# EAGLE board test02.postroute (EAGLE 7.5.0)
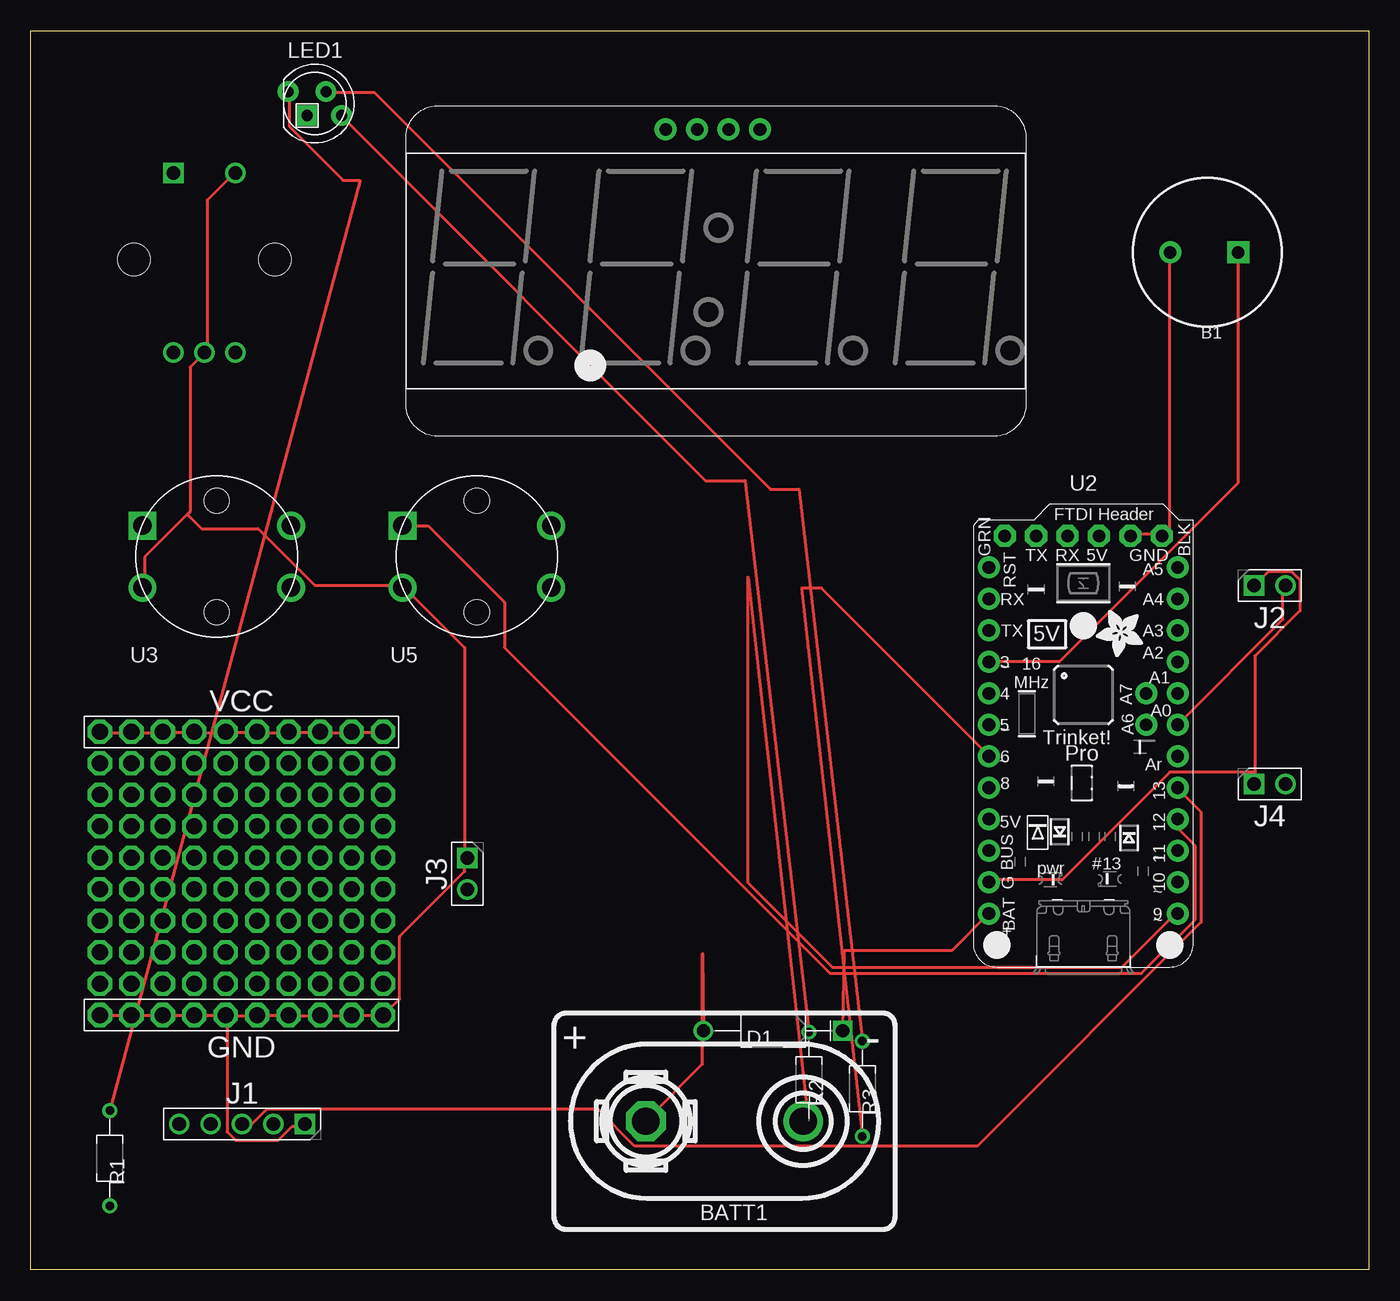
[diagram p0: board, top side]
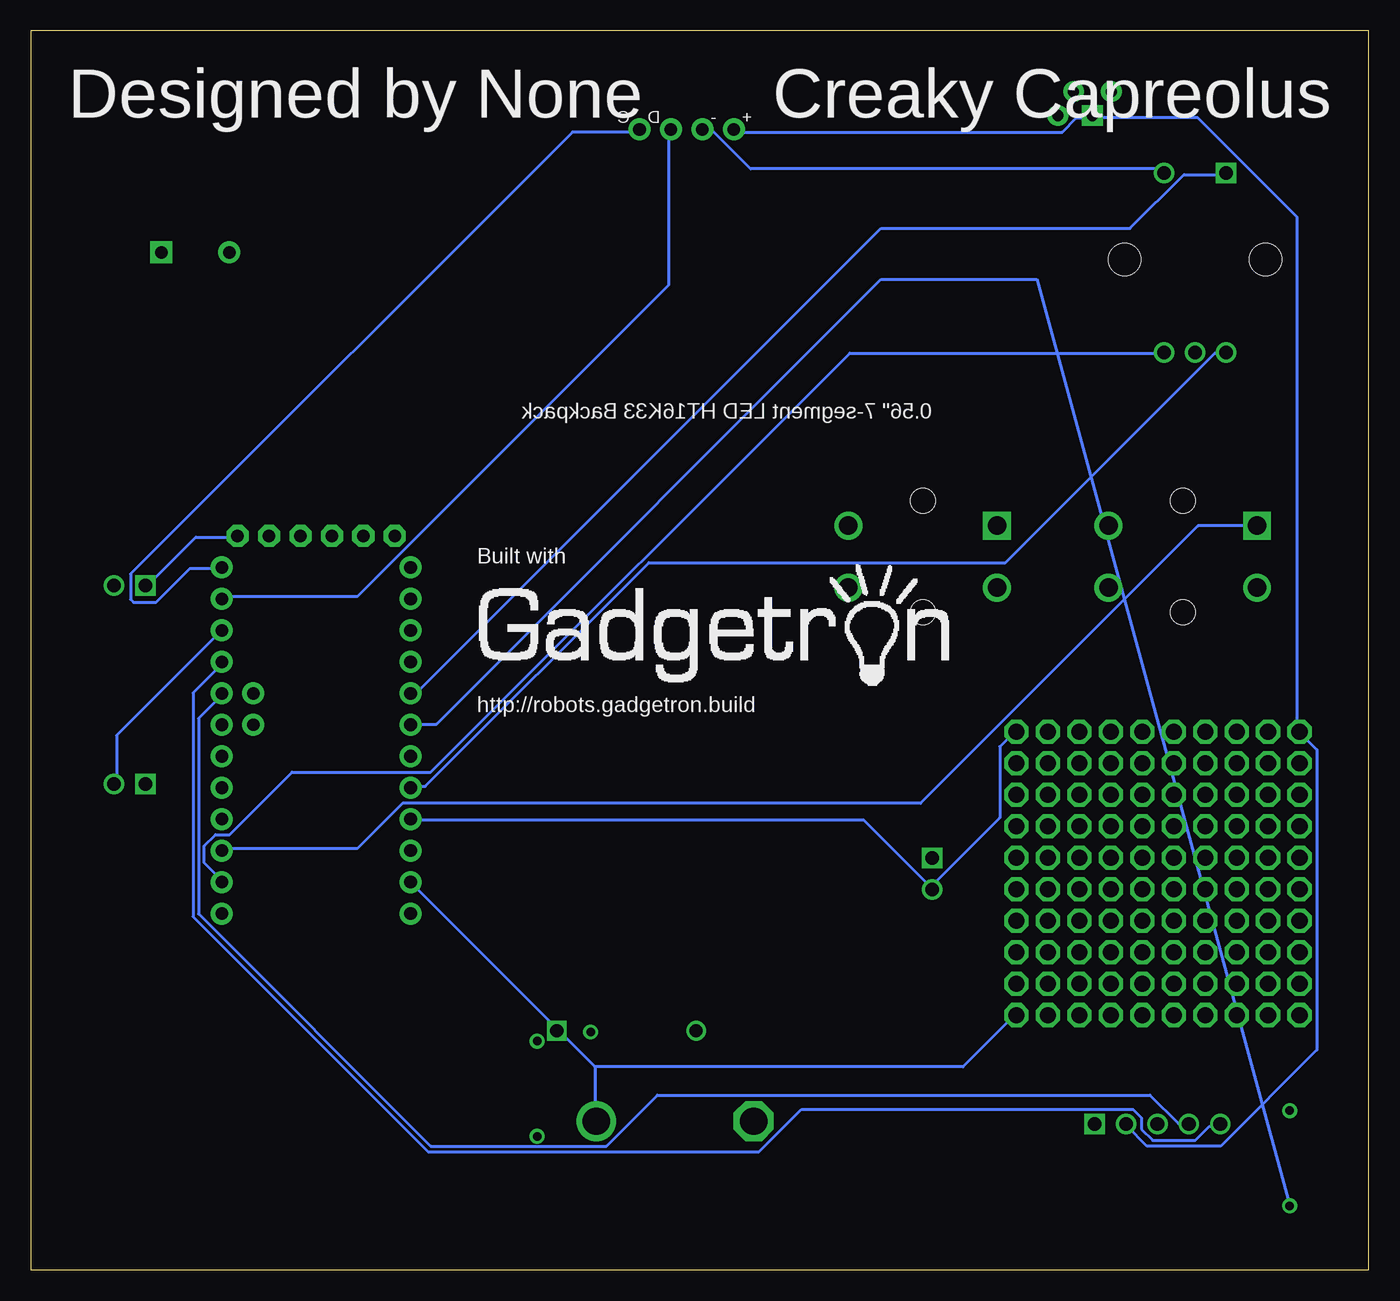
[diagram p1: board, bottom side, seen from below]

Size 108 x 100 mm. Coordinates in mm from the lower left corner, seen from the top.
Outline: 0,0 0,100 108,100 108,0 0,0
Copper layers (1*16): Top 0.035mm / dielectric 1.5mm / Bottom 0.035mm
Design rules "default": minimum track width 10mil, minimum drill 0.6mm, track to track 8mil, track to pad 8mil, pad to pad 8mil, via to via 8mil, smd to smd 8mil, copper to edge 40mil, drill to drill 8mil, minimum pad ring 10mil, minimum via ring 8mil, stop-mask expansion 4mil, vias tented up to drill 0mil, thermal gap 10mil

## Footprints (pad centres in the part's own frame; a part is rotated, then mirrored left to right if it is on the bottom)
BUZZER-12MM-ADAFRUIT-160 = drill 1 pad 1.778 square: + 2.5,0 | drill 1 pad 1.778: - -3,0
BATTERY_9V_KEYSTONE_968 = drill 2.2: N 6.35,0 | drill 2.2 octagon: P -6.35,0
DIOAD1125W78L520D270_HS = drill 1.06 pad 1.59: A 5.625,0 | drill 1.06 pad 1.59 square: C -5.625,0
HDRV5W63P254_5X1_1270X254H838_HS = drill 1.1 pad 1.65 square: 1 0,0 | drill 1.1 pad 1.65: 2 2.54,0; 3 5.08,0; 4 7.62,0; 5 10.16,0
HDRV2W63P254_2X1_508X254H838_HS = drill 1.1 pad 1.65 square: 1 0,0 | drill 1.1 pad 1.65: 2 2.54,0
LED5MMRGB = drill 0.9 pad 1.676: 1 -2.159,0.968; 3 0.889,0.968; 4 2.159,-0.968 | drill 0.9 pad 1.676 square: 2 -0.635,-0.968
RESAD770W45L370D210_HS = drill 0.7 pad 1.1: 1 -3.85,0; 2 3.85,0
PROTO-AREA-10X10 = drill 1.3 octagon: P$1 0,0; P$2 2.54,0; P$3 5.08,0; P$4 7.62,0; P$5 10.16,0; P$6 12.7,0; P$7 15.24,0; P$8 17.78,0; P$9 20.32,0; P$10 22.86,0; P$11 0,22.86; P$12 2.54,22.86; P$13 5.08,22.86; P$14 7.62,22.86; P$15 10.16,22.86; P$16 12.7,22.86; P$17 15.24,22.86; P$18 17.78,22.86; P$19 20.32,22.86; P$20 22.86,22.86; P$21 0,2.54; P$22 2.54,2.54; P$23 5.08,2.54; P$24 7.62,2.54; P$25 10.16,2.54; P$26 12.7,2.54; P$27 15.24,2.54; P$28 17.78,2.54; P$29 20.32,2.54; P$30 22.86,2.54; P$31 22.86,5.08; P$32 20.32,5.08; P$33 17.78,5.08; P$34 15.24,5.08; P$35 12.7,5.08; P$36 10.16,5.08; P$37 7.62,5.08; P$38 5.08,5.08; P$39 2.54,5.08; P$40 0,5.08; P$41 0,7.62; P$42 2.54,7.62; P$43 5.08,7.62; P$44 7.62,7.62; P$45 10.16,7.62; P$46 12.7,7.62; P$47 15.24,7.62; P$48 17.78,7.62; P$49 20.32,7.62; P$50 22.86,7.62; P$51 22.86,10.16; P$52 20.32,10.16; P$53 17.78,10.16; P$54 15.24,10.16; P$55 12.7,10.16; P$56 10.16,10.16; P$57 7.62,10.16; P$58 5.08,10.16; P$59 2.54,10.16; P$60 0,10.16; P$61 0,12.7; P$62 2.54,12.7; P$63 5.08,12.7; P$64 7.62,12.7; P$65 10.16,12.7; P$66 12.7,12.7; P$67 15.24,12.7; P$68 17.78,12.7; P$69 20.32,12.7; P$70 22.86,12.7; P$71 22.86,15.24; P$72 20.32,15.24; P$73 17.78,15.24; P$74 15.24,15.24; P$75 12.7,15.24; P$76 10.16,15.24; P$77 7.62,15.24; P$78 5.08,15.24; P$79 2.54,15.24; P$80 0,15.24; P$81 0,17.78; P$82 2.54,17.78; P$83 5.08,17.78; P$84 7.62,17.78; P$85 10.16,17.78; P$86 12.7,17.78; P$87 15.24,17.78; P$88 17.78,17.78; P$89 20.32,17.78; P$90 22.86,17.78; P$91 22.86,20.32; P$92 20.32,20.32; P$93 17.78,20.32; P$94 15.24,20.32; P$95 12.7,20.32; P$96 10.16,20.32; P$97 7.62,20.32; P$98 5.08,20.32; P$99 2.54,20.32; P$100 0,20.32
ADAFRUIT-PRO-TRINKET-5V = drill 1.016 pad 1.778: +5V 7.62,24.13; A0 -7.62,16.51; A1 -7.62,13.97; A2 -7.62,11.43; A3 -7.62,8.89; A4 -7.62,6.35; A5 -7.62,3.81; AREF -7.62,19.05; D3 7.62,11.43; D4 7.62,13.97; D5 7.62,16.51; D6 7.62,19.05; D8 7.62,21.59; D9 -7.62,31.75; D10 -7.62,29.21; D11 -7.62,26.67; D12 -7.62,24.13; D13 -7.62,21.59; GND2 7.62,29.21; RESET 7.62,3.81; RXD1 7.62,6.35; TXD1 7.62,8.89; VBAT 7.62,31.75; VBUS1 7.62,26.67 | drill 1 pad 1.778: A6 -5.08,16.51; A7 -5.08,13.97 | drill 1.016 pad 1.778 octagon: DTR/RTS 6.35,1.27; GND -6.35,1.27; GND1 -3.81,1.27; RXD 1.27,1.27; TXD 3.81,1.27; VBUS -1.27,1.27
BUTTON-TACTILE-ROUND-ADAFRUIT1009 = drill 1.5 square: P -6,2.5 | drill 1.5: P2 6,2.5; S -6,-2.5; S2 6,-2.5 | hole 2: 0,-4.5; 0,4.5
ROTARY-ENCODER-W/BUTTON-ADAFRUIT377 = drill 1.1: A -2.5,-7.5; B 2.5,-7.5; BUTB 2.5,7; COMMON 0,-7.5 | drill 1.1 square: BUTA -2.5,7 | hole 2.6: -5.7,0; 5.7,0
ADAFRUIT-7SEG-BACKPACK = drill 1.016 pad 1.778: GND -1.524,11.43; SCL 3.556,11.43; SDA 1.016,11.43; VDD -4.064,11.43

## Placement (x,y rotation side)
B1  BUZZER-ADAFRUIT-160  [BUZZER-12MM-ADAFRUIT-160]  94.98,82.13 0 top
BATT1  BATTERY-9V-VERTICAL  [BATTERY_9V_KEYSTONE_968]  56,12 0 top
D1  [DIOAD1125W78L520D270_HS]  59.92,19.31 180 top
J1  [HDRV5W63P254_5X1_1270X254H838_HS]  22.13,11.77 180 top
J2  [HDRV2W63P254_2X1_508X254H838_HS]  98.76,55.23 0 top
J3  [HDRV2W63P254_2X1_508X254H838_HS]  35.23,33.24 270 top
J4  [HDRV2W63P254_2X1_508X254H838_HS]  98.76,39.23 0 top
LED1  RGBLED_CA-5MM  [LED5MMRGB]  22.93,94.14 0 top
LOGO  [BUILT_WITH_GADGETRON]  54,50 0 bottom
R1  150  [RESAD770W45L370D210_HS]  6.37,9.01 270 top
R2  100  [RESAD770W45L370D210_HS]  62.8,15.35 270 top
R3  100  [RESAD770W45L370D210_HS]  67.13,14.62 270 top
U1  PROTO-AREA-10X10  [PROTO-AREA-10X10]  5.57,20.57 0 top
U2  ADAFRUIT-PRO-TRINKET-5V-BOB  [ADAFRUIT-PRO-TRINKET-5V]  84.97,60.51 180 top
U3  BUTTON-TACTILE-ROUND  [BUTTON-TACTILE-ROUND-ADAFRUIT1009]  15,57.57 0 top
U4  ROTARY-ENCODER-W/BUTTON-ADAFRUIT377  [ROTARY-ENCODER-W/BUTTON-ADAFRUIT377]  14,81.55 0 top
U5  BUTTON-TACTILE-ROUND  [BUTTON-TACTILE-ROUND-ADAFRUIT1009]  36,57.57 0 top
U6  ADAFRUIT-7SEG-BACKPACK-RED  [ADAFRUIT-7SEG-BACKPACK]  55.31,80.63 0 top

## Library data of the parts
B1 = Components; DIST: Adafruit; DISTPN: 160; HIERARCHY_NAME: buzzer.u1
BATT1 = Components; DIST: Digikey; DISTPN: 36-968-ND; HIERARCHY_NAME: battery.BATT1
D1 = KoalaBuild; DATASHEET: http://www.st.com/web/en/resource/technical/document/datasheet/CD00001625.pdf; DATA_SHEET: http://www.st.com/web/en/resource/technical/document/datasheet/CD00001625.pdf; DB: /Users/swanson/research/NVSL/src/with-git/gtron_devel/Gadgets/Tools/Koala/Koala/PartLibrary/Digikey/Schottky-Diodes-TH.csv; DEVICE: TH-DO-41-AND-DO-204AL; DIST: Digikey; DISTPN: 497-4547-1-ND; HIERARCHY_NAME: battery.D1; IMAGE: http://media.digikey.com/photos/STMicro%20Photos/1N5819.JPG; IRECT: 1A; MFR: STMicroelectronics; MIN_QTY: 1; MPN: 1N5817; PACKAGE: DIOAD1125W78L520D270_HS; PRICE: $0.57; SIZE: TH; STOCK: STOCK; VALUE: 450mV; VREV: 20V
J1 = Components; DIST: Digikey; DISTPN: S6103-ND; HIERARCHY_NAME: digital_2.J1; PIN1: GND; PIN2: D1; PIN3: D2; PIN4: D3; PIN5: D4
J2 = Components; DIST: Digikey; DISTPN: S7000-ND; HIERARCHY_NAME: analog.J1; PIN1: GND; PIN2: A1
J3 = Components; DIST: Digikey; DISTPN: S7000-ND; HIERARCHY_NAME: power.J1; PIN1: GND; PIN2: VDD
J4 = Components; DIST: Digikey; DISTPN: S7000-ND; HIERARCHY_NAME: digital.J1; PIN1: GND; PIN2: D1
LED1 = Components; DIST: Adafruit; DISTPN: 302; HIERARCHY_NAME: led_2.LED1
LOGO = Artwork
R1 = KoalaBuild; CASE: TH; DATASHEET: http://www.yageo.com/NewPortal/yageodocoutput?fileName=/pdf/throughhole/Yageo_LR_CFR_2013.pdf; DATA_SHEET: http://www.yageo.com/NewPortal/yageodocoutput?fileName=/pdf/throughhole/Yageo_LR_CFR_2013.pdf; DB: /Users/swanson/research/NVSL/src/with-git/gtron_devel/Gadgets/Tools/Koala/Koala/PartLibrary/Digikey/Resistors-TH.csv; DEVICE: TH-1/6W-CARBON; DIST: Digikey; DISTPN: 150EBK-ND; HIERARCHY_NAME: led_2.U$3; IMAGE: http://media.digikey.com/Renders/Yageo%20Renders/CFR-12JR-150R.jpg; MFR: Yageo; MIN_QTY: 1; MPN: CFR-12JB-52-150R; PACKAGE: RESAD770W45L370D210_HS; PRICE: $0.10; PWR: 167mW; SIZE: TH; STOCK: STOCK; TOL: 5%; VALUE_QUERY: 150
R2 = KoalaBuild; CASE: TH; DATASHEET: http://www.yageo.com/NewPortal/yageodocoutput?fileName=/pdf/throughhole/Yageo_LR_CFR_2013.pdf; DATA_SHEET: http://www.yageo.com/NewPortal/yageodocoutput?fileName=/pdf/throughhole/Yageo_LR_CFR_2013.pdf; DB: /Users/swanson/research/NVSL/src/with-git/gtron_devel/Gadgets/Tools/Koala/Koala/PartLibrary/Digikey/Resistors-TH.csv; DEVICE: TH-1/6W-CARBON; DIST: Digikey; DISTPN: 100EBK-ND; HIERARCHY_NAME: led_2.U$1; IMAGE: http://media.digikey.com/Renders/Yageo%20Renders/CFR-12JR-100R.jpg; MFR: Yageo; MIN_QTY: 1; MPN: CFR-12JB-52-100R; PACKAGE: RESAD770W45L370D210_HS; PRICE: $0.10; PWR: 167mW; SIZE: TH; STOCK: STOCK; TOL: 5%; VALUE_QUERY: 100
R3 = KoalaBuild; CASE: TH; DATASHEET: http://www.yageo.com/NewPortal/yageodocoutput?fileName=/pdf/throughhole/Yageo_LR_CFR_2013.pdf; DATA_SHEET: http://www.yageo.com/NewPortal/yageodocoutput?fileName=/pdf/throughhole/Yageo_LR_CFR_2013.pdf; DB: /Users/swanson/research/NVSL/src/with-git/gtron_devel/Gadgets/Tools/Koala/Koala/PartLibrary/Digikey/Resistors-TH.csv; DEVICE: TH-1/6W-CARBON; DIST: Digikey; DISTPN: 100EBK-ND; HIERARCHY_NAME: led_2.U$2; IMAGE: http://media.digikey.com/Renders/Yageo%20Renders/CFR-12JR-100R.jpg; MFR: Yageo; MIN_QTY: 1; MPN: CFR-12JB-52-100R; PACKAGE: RESAD770W45L370D210_HS; PRICE: $0.10; PWR: 167mW; SIZE: TH; STOCK: STOCK; TOL: 5%; VALUE_QUERY: 100
U1 = Components; DIST: Gadgetron; DISTPN: proto-area-10x10; HIERARCHY_NAME: proto_area.u1
U2 = BOBs; DIST: Adafruit; DISTPN: 2000; HIERARCHY_NAME: brain.U1
U3 = Components; DIST: Adafruit; DISTPN: 1009; HIERARCHY_NAME: button.B1
U4 = Components; DIST: Adafruit; DISTPN: 377; HIERARCHY_NAME: knob.U1
U5 = Components; DIST: Adafruit; DISTPN: 1009; HIERARCHY_NAME: button_2.B1
U6 = BOBs; DIST: Adafruit; DISTPN: 878; HIERARCHY_NAME: display.u1

## Nets
2_0_BUZZER: B1.- BATT1.N J1.1 J2.1 J3.1 J4.1 U1.P$1 U1.P$2 U1.P$3 U1.P$4 U1.P$5 U1.P$6 U1.P$7 U1.P$8 U1.P$9 U1.P$10 U2.GND U2.GND1 U2.GND2 U3.S U4.BUTB U4.COMMON U5.S U6.GND
+5V_7_BRAIN: J1.2 J3.2 LED1.2 U1.P$11 U1.P$12 U1.P$13 U1.P$14 U1.P$15 U1.P$16 U1.P$17 U1.P$18 U1.P$19 U1.P$20 U2.+5V U6.VDD
A0_7_BRAIN: J2.2 U2.A0
A1_7_BRAIN: J1.4 U2.A1
A2_7_BRAIN: J1.5 U2.A2
A3_7_BRAIN: J4.2 U2.A3
A4_7_BRAIN: U2.A4 U6.SDA
A5_7_BRAIN: U2.A5 U6.SCL
A6_7_BRAIN: U2.A6
A7_7_BRAIN: U2.A7
AREF_7_BRAIN: U2.AREF
D3_7_BRAIN: B1.+ U2.D3
D4_7_BRAIN: U2.D4 U4.BUTA
D5_7_BRAIN: R1.2 U2.D5
D6_7_BRAIN: R3.2 U2.D6
D8_7_BRAIN: U2.D8 U4.A
D9_7_BRAIN: R2.2 U2.D9
D10_7_BRAIN: U2.D10 U4.B
D11_7_BRAIN: U2.D11 U3.P
D12_7_BRAIN: U2.D12 U5.P
D13_7_BRAIN: J1.3 U2.D13
DTR/RTS_7_BRAIN: U2.DTR/RTS
N$1_3_BATTERY: BATT1.P D1.A
N$1_4_LED_2: LED1.4 R2.1
N$2_4_LED_2: LED1.3 R3.1
N$3_4_LED_2: LED1.1 R1.1
POS_3_BATTERY: D1.C U2.VBAT
RESET_7_BRAIN: U2.RESET
RXD1_7_BRAIN: U2.RXD1
RXD_7_BRAIN: U2.RXD
TXD1_7_BRAIN: U2.TXD1
TXD_7_BRAIN: U2.TXD
VBUS1_7_BRAIN: U2.VBUS1
VBUS_7_BRAIN: U2.VBUS

## Tracks (layer width: path | path; a pad name or v marks a point on that pad's centre or on a via)
2_0_BUZZER
  Top 0.254: J1.1 22,11.59 21.08,11.59 19.94,10.45 16.51,10.45 15.82,11.14 15.82,20.51 | U4.BUTB 16.28,88.41 14.22,86.35 14.22,74.23 U4.COMMON 13.99,74 12.85,72.86 12.85,61.2 12.62,60.97 | 15.82,20.51 18.11,20.51 U1.P$6 18.34,20.51 20.62,20.51 U1.P$7 20.85,20.51 23.14,20.51 U1.P$8 23.37,20.51 25.88,20.51 U1.P$9 26.11,20.51 28.4,20.51 U1.P$10 28.62,20.74 29.77,21.88 29.77,26.91 35.03,32.17 35.03,33.08 J3.1 35.03,33.31 35.03,50.23 30.23,55.03 U5.S 30,55.26 22.91,55.26 18.34,59.83 13.77,59.83 12.62,60.97 | 15.82,20.51 U1.P$5 15.59,20.51 13.31,20.51 U1.P$4 13.08,20.51 10.8,20.51 U1.P$3 10.57,20.51 8.28,20.51 U1.P$2 8.05,20.51 5.77,20.51 U1.P$1 | 12.62,60.97 9.19,57.54 9.19,55.26 U3.S | U2.GND2 77.55,31.48 83.26,31.48 91.95,40.17 98.81,40.17 | U2.GND1 88.98,59.37 91.26,59.37 U2.GND 91.49,59.37 91.95,59.83 91.95,82 B1.- | 98.81,40.17 98.81,49.54 102.46,53.2 102.46,55.72 101.78,56.4 99.95,56.4 98.81,55.26 J2.1 | J4.1 98.81,39.26 98.81,40.17
  Bottom 0.254: U6.GND 53.77,91.83 52.86,91.83 49.88,88.86 16.74,88.86 16.51,88.63 U4.BUTB | 62.46,16.4 32.74,16.4 28.62,20.51 U1.P$10 | U2.GND2 77.32,31.25 62.46,16.4 | U2.GND 91.49,59.14 94.69,59.14 98.58,55.26 J2.1 | 62.46,16.4 62.46,12.05 BATT1.N
+5V_7_BRAIN
  Top 0.254: U1.P$20 28.4,43.37 26.11,43.37 U1.P$19 25.88,43.37 23.37,43.37 U1.P$18 23.14,43.37 20.85,43.37 U1.P$17 20.62,43.37 18.34,43.37 U1.P$16 18.11,43.37 15.82,43.37 U1.P$15 15.59,43.37 13.31,43.37 U1.P$14 13.08,43.37 10.8,43.37 U1.P$13 10.57,43.37 8.28,43.37 U1.P$12 8.05,43.37 5.77,43.37 U1.P$11
  Bottom 0.254: U6.VDD 51.03,91.83 24.74,91.83 23.6,92.98 22.45,92.98 LED1.2 22.23,92.98 13.77,92.98 5.77,84.98 5.77,43.6 U1.P$11 5.54,43.37 4.16,42 4.16,17.77 11.94,9.99 17.88,9.99 19.48,11.59 J1.2 | U1.P$20 28.62,43.37 29.77,42.23 29.77,36.51 35.03,31.25 35.03,30.8 J3.2 35.25,30.8 40.74,36.28 77.32,36.28 U2.+5V
A0_7_BRAIN
  Top 0.254: U2.A0 92.63,44.06 101.09,52.52 101.09,55.03 J2.2
A1_7_BRAIN
  Bottom 0.254: J1.4 14.68,11.82 15.37,11.82 17.65,14.11 57.43,14.11 61.54,9.99 75.72,9.99 94.46,28.74 94.46,44.51 92.63,46.34 U2.A1
A2_7_BRAIN
  Bottom 0.254: J1.5 12.17,11.59 12.85,11.59 13.99,10.45 17.42,10.45 18.34,11.37 18.34,12.28 19.02,12.97 45.77,12.97 49.2,9.54 75.95,9.54 94.92,28.51 94.92,46.57 92.63,48.86 U2.A2
A3_7_BRAIN
  Bottom 0.254: U2.A3 92.63,51.6 101.09,43.14 101.09,39.26 J4.2
A4_7_BRAIN
  Bottom 0.254: U6.SDA 56.52,91.83 56.52,79.49 81.66,54.34 92.41,54.34 U2.A4
A5_7_BRAIN
  Bottom 0.254: U2.A5 92.63,56.63 95.15,56.63 97.89,53.89 99.72,53.89 99.95,54.12 99.95,56.17 64.29,91.83 59.03,91.83 U6.SCL
D3_7_BRAIN
  Top 0.254: U2.D3 77.55,49.09 83.03,49.09 97.43,63.49 97.43,82 B1.+
D4_7_BRAIN
  Bottom 0.254: U4.BUTA 11.71,88.41 14.91,88.41 19.25,84.06 39.37,84.06 76.86,46.57 77.32,46.57 U2.D4
D5_7_BRAIN
  Bottom 0.254: R1.2 26.8,79.95 39.37,79.95 75.26,44.06 77.32,44.06 U2.D5
D6_7_BRAIN
  Top 0.254: U2.D6 77.32,41.54 63.83,55.03 62.23,55.03 R3.2
D8_7_BRAIN
  Bottom 0.254: U4.A 11.71,74 12.4,74 29.31,57.09 58.12,57.09 76.17,39.03 77.32,39.03 U2.D8
D9_7_BRAIN
  Top 0.254: R2.2 57.89,55.94 57.89,31.25 64.74,24.4 88.06,24.4 92.41,28.74 U2.D9
D10_7_BRAIN
  Bottom 0.254: U4.B 16.51,74 41.88,74 75.72,40.17 86.92,40.17 91.95,35.14 93.09,35.14 94,34.23 94,32.86 92.63,31.48 U2.D10
D11_7_BRAIN
  Bottom 0.254: U3.P 9.19,60.06 13.77,60.06 36.17,37.66 78,37.66 81.66,34 92.41,34 U2.D11
D12_7_BRAIN
  Top 0.254: U5.P 30.23,60.06 32.05,60.06 38.23,53.89 38.23,50.23 64.52,23.94 89.66,23.94 94,28.28 94,34.23 92.63,35.6 92.63,36.28 U2.D12
D13_7_BRAIN
  Top 0.254: J1.3 17.2,11.82 17.88,11.82 19.02,12.97 45.77,12.97 48.74,9.99 76.4,9.99 94.46,28.05 94.46,36.97 92.63,38.8 U2.D13
N$1_3_BATTERY
  Top 0.254: BATT1.P 49.66,12.05 54.23,16.62 54.23,25.54 D1.A
N$1_4_LED_2
  Top 0.254: LED1.4 25.2,92.98 54.46,63.72 57.66,63.72 R2.1
N$2_4_LED_2
  Top 0.254: LED1.3 23.82,95.03 27.71,95.03 59.72,63.03 62,63.03 R3.1
N$3_4_LED_2
  Top 0.254: R1.1 26.57,87.95 25.2,87.95 20.85,92.29 20.85,95.03 LED1.1
POS_3_BATTERY
  Top 0.254: D1.C 65.66,25.77 74.34,25.77 77.32,28.74 U2.VBAT

## Text on the board
bPlace: Creaky Capreolus | Designed by None